# Altium PCB PCB.PcbDoc (part 2 of 2)
Units mm, origin at the board's own origin, x right, y up, seen from the top; angles counter-clockwise.
Board outline 50 x 50 mm, 4 copper layers (Top Layer, VCC, GND, Bottom Layer), stack 1.586 mm thick; 85 components, 151 nets, 720 pads, 300 vias.
Unrouted connection lines stored in the file: 6.
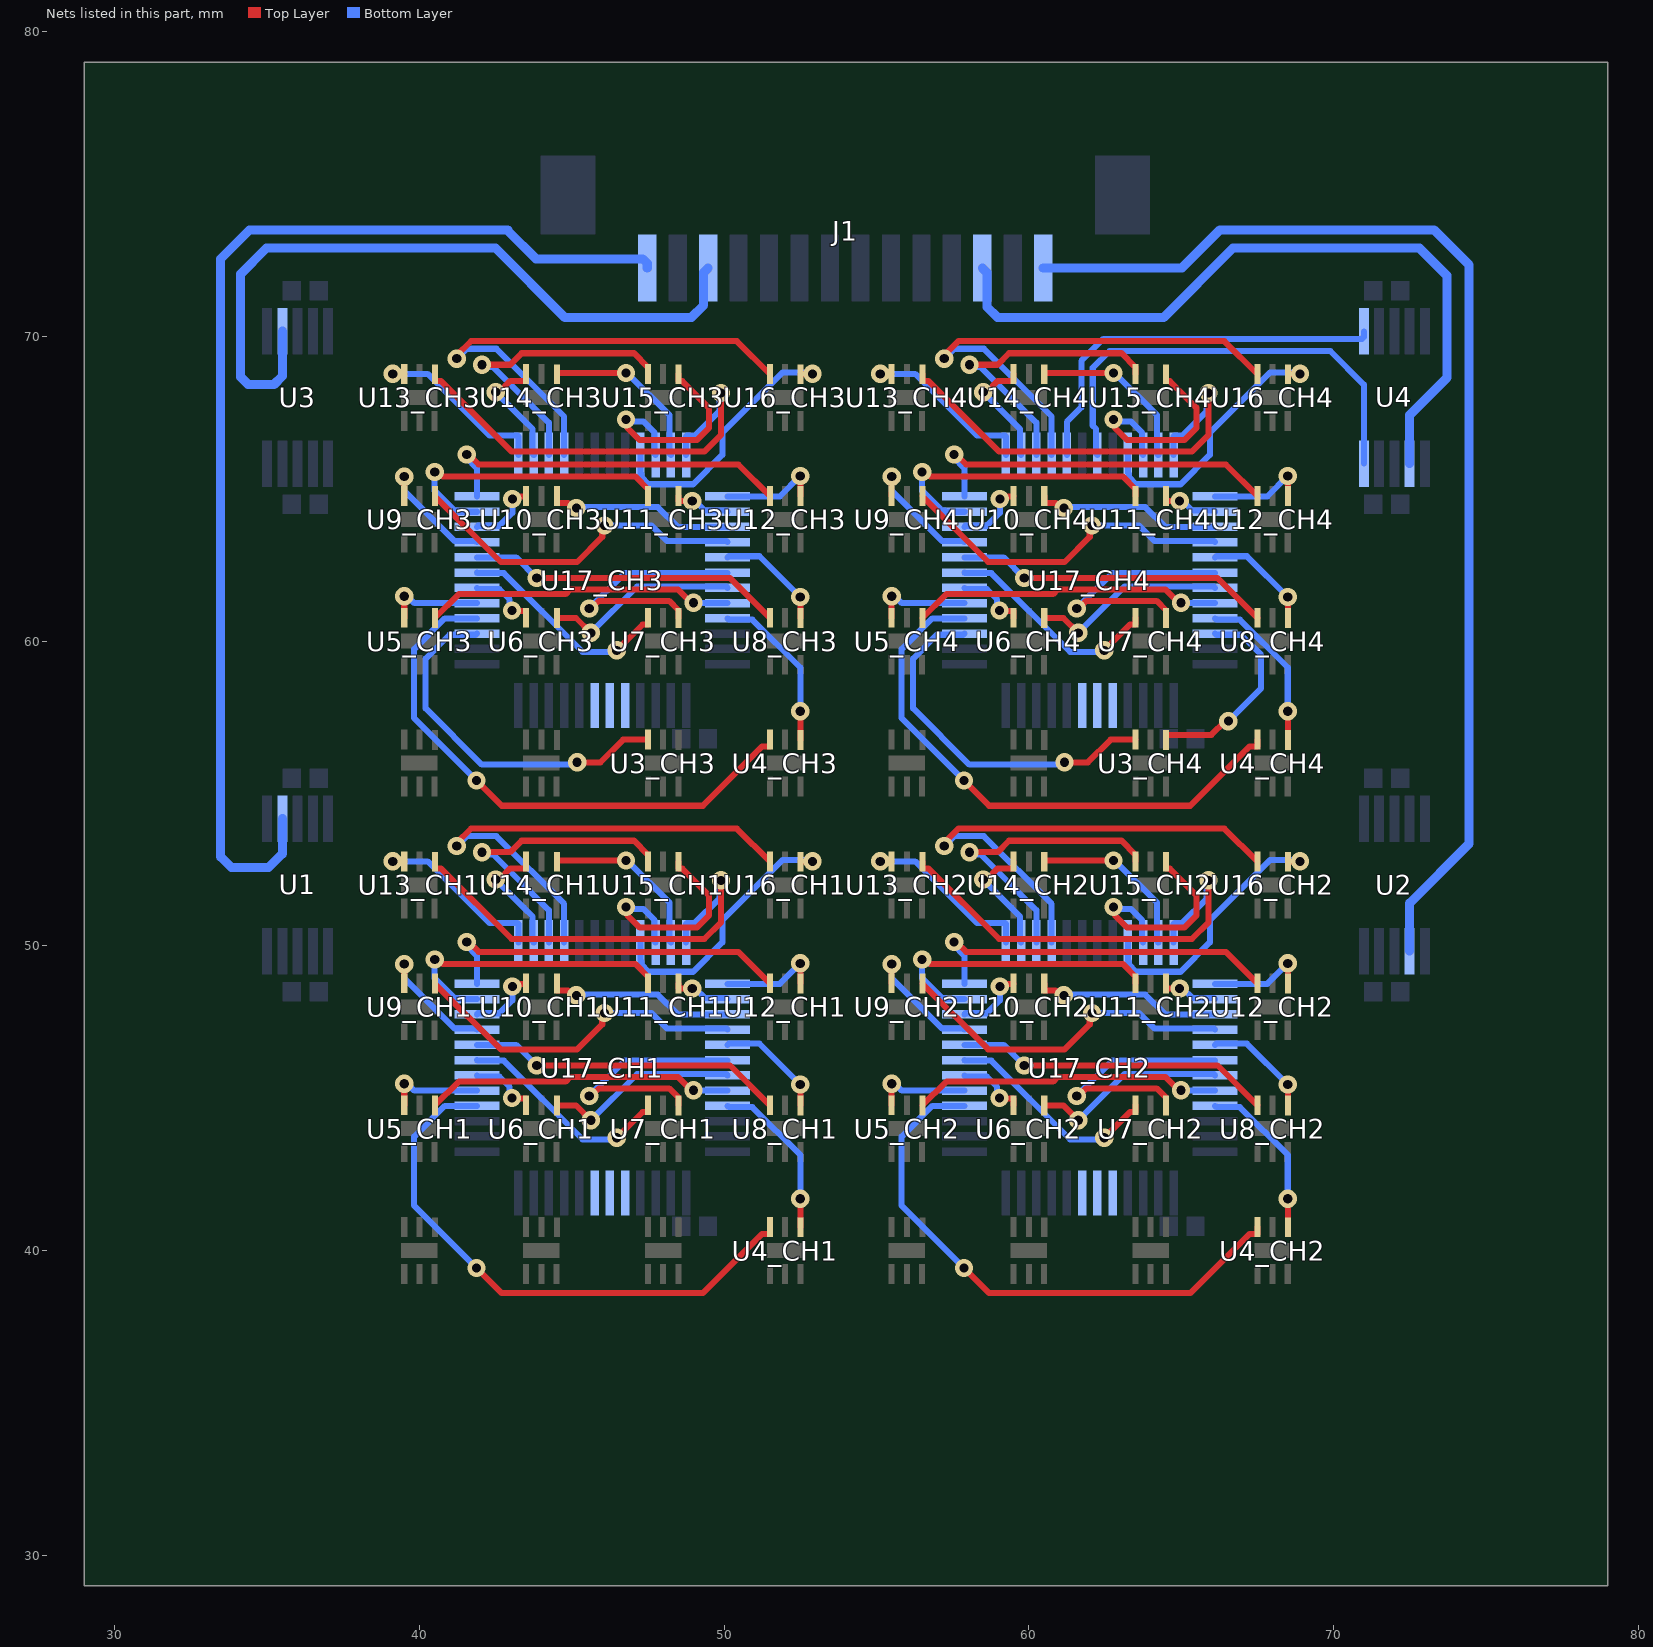
[diagram p4: the nets of this part, all layers, seen from the top]

## Via types
v1: diameter 0.6, hole 0.3, Top Layer to Bottom Layer, tented both sides, 292 vias
v2: diameter 0.9, hole 0.4, Top Layer to Bottom Layer, tented both sides, 8 vias

## Nets (pads, with @x,y where several pads share a name; then routed paths per layer and width w, separated by ;. In a path a pad name is that pad's centre, name@x,y a point inside that pad or via, vN(x,y) a via of type N, cw(c..) or ccw(c..) an arc to the next point about the centre after c; other vN are vias at no path point) (continued)
NetU3_CH3_6: U3_CH3.6 U17_CH3.27 | length 12.1
  Top Layer w0.2: v1(45.175,56.025) 45.942,56.025 46.687,56.77 U3_CH3.6@47.5,56.77
  Bottom Layer w0.2: U17_CH3.27@41.885,60.25 41.845,60.21 40.985,60.21 40.2,59.425 40.2,57.8 42.05,55.95 45.1,55.95 v1(45.175,56.025)
NetU3_CH4_4: U3_CH4.4 U17_CH4.10 | length 6.8
  Top Layer w0.2: U3_CH4.4@64.508,56.762 64.508,56.925 65.992,56.925 66.442,57.375 v1(66.55,57.375)
  Bottom Layer w0.2: U17_CH4.10@66.115,60.25 66.154,60.21 66.965,60.21 67.623,59.552 67.623,58.448 v1(66.55,57.375)
NetU3_CH4_6: U3_CH4.6 U17_CH4.27 | length 12.1
  Top Layer w0.2: v1(61.175,56.025) 61.942,56.025 62.687,56.77 U3_CH4.6@63.5,56.77
  Bottom Layer w0.2: U17_CH4.27@57.885,60.25 57.845,60.21 56.985,60.21 56.2,59.425 56.2,57.8 58.05,55.95 61.1,55.95 v1(61.175,56.025)
NetU4_1: U4.1 U17_CH4.41 | length 13.1
  Bottom Layer w0.2: U17_CH4.41@61.25,66.115 61.25,67.2 61.725,67.675 61.725,69.2 62.45,69.925 70.935,69.925 71,69.99 U4.1@71,70.172
NetU4_10: U4.10 U17_CH4.43 | length 15.1
  Bottom Layer w0.2: U17_CH4.43@62.25,66.115 62.21,66.154 62.21,66.965 62.1,67.075 62.1,68.975 62.65,69.525 69.895,69.525 71,68.42 U4.10@71,65.828
NetU4_CH1_4: U4_CH1.4 U17_CH1.9 | length 5.4
  Top Layer w0.2: v1(52.5,41.7) 52.508,41.692 U4_CH1.4@52.508,40.762
  Bottom Layer w0.2: U17_CH1.9@50.115,44.75 50.154,44.71 50.927,44.71 52.5,43.137 v1(52.5,41.7)
NetU4_CH1_6: U4_CH1.6 U17_CH1.28 | length 18.6
  Top Layer w0.2: v1(41.875,39.425) 42.7,38.6 49.3,38.6 51.245,40.545 51.5,40.545 U4_CH1.6@51.5,40.77
  Bottom Layer w0.2: v1(41.875,39.425) 39.825,41.475 39.825,43.74 40.835,44.75 U17_CH1.28@41.885,44.75
NetU4_CH2_4: U4_CH2.4 U17_CH2.9 | length 5.4
  Top Layer w0.2: v1(68.5,41.7) 68.508,41.692 U4_CH2.4@68.508,40.762
  Bottom Layer w0.2: U17_CH2.9@66.115,44.75 66.154,44.71 66.927,44.71 68.5,43.137 v1(68.5,41.7)
NetU4_CH2_6: U4_CH2.6 U17_CH2.28 | length 18.6
  Top Layer w0.2: v1(57.875,39.425) 58.7,38.6 65.3,38.6 67.245,40.545 67.5,40.545 U4_CH2.6@67.5,40.77
  Bottom Layer w0.2: v1(57.875,39.425) 55.825,41.475 55.825,43.74 56.835,44.75 U17_CH2.28@57.885,44.75
NetU4_CH3_4: U4_CH3.4 U17_CH3.9 | length 5.4
  Top Layer w0.2: v1(52.5,57.7) 52.508,57.692 U4_CH3.4@52.508,56.762
  Bottom Layer w0.2: U17_CH3.9@50.115,60.75 50.154,60.71 50.927,60.71 52.5,59.137 v1(52.5,57.7)
NetU4_CH3_6: U4_CH3.6 U17_CH3.28 | length 18.6
  Top Layer w0.2: v1(41.875,55.425) 42.7,54.6 49.3,54.6 51.245,56.545 51.5,56.545 U4_CH3.6@51.5,56.77
  Bottom Layer w0.2: v1(41.875,55.425) 39.825,57.475 39.825,59.74 40.835,60.75 U17_CH3.28@41.885,60.75
NetU4_CH4_4: U4_CH4.4 U17_CH4.9 | length 5.4
  Top Layer w0.2: v1(68.5,57.7) 68.508,57.692 U4_CH4.4@68.508,56.762
  Bottom Layer w0.2: U17_CH4.9@66.115,60.75 66.154,60.71 66.927,60.71 68.5,59.137 v1(68.5,57.7)
NetU4_CH4_6: U4_CH4.6 U17_CH4.28 | length 18.6
  Top Layer w0.2: v1(57.875,55.425) 58.7,54.6 65.3,54.6 67.245,56.545 67.5,56.545 U4_CH4.6@67.5,56.77
  Bottom Layer w0.2: v1(57.875,55.425) 55.825,57.475 55.825,59.74 56.835,60.75 U17_CH4.28@57.885,60.75
NetU5_CH1_4: U5_CH1.4 U17_CH1.8 | length 10.2
  Top Layer w0.2: U5_CH1.4@40.508,44.762 41.292,45.546 44.796,45.546 44.95,45.7 48.484,45.7 48.921,45.263 v1(48.997,45.263)
  Bottom Layer w0.2: v1(48.997,45.263) 49.004,45.256 50.108,45.256 U17_CH1.8@50.115,45.25
NetU5_CH1_6: U5_CH1.6 U17_CH1.29 | length 3.2
  Top Layer w0.2: U5_CH1.6@39.5,44.77 v1(39.5,45.475)
  Bottom Layer w0.2: v1(39.5,45.475) 39.608,45.475 39.833,45.25 U17_CH1.29@41.885,45.25
NetU5_CH2_4: U5_CH2.4 U17_CH2.8 | length 10.2
  Top Layer w0.2: U5_CH2.4@56.508,44.762 57.292,45.546 60.796,45.546 60.95,45.7 64.484,45.7 64.921,45.263 v1(64.997,45.263)
  Bottom Layer w0.2: v1(64.997,45.263) 65.004,45.256 66.108,45.256 U17_CH2.8@66.115,45.25
NetU5_CH2_6: U5_CH2.6 U17_CH2.29 | length 3.2
  Top Layer w0.2: U5_CH2.6@55.5,44.77 v1(55.5,45.475)
  Bottom Layer w0.2: v1(55.5,45.475) 55.608,45.475 55.833,45.25 U17_CH2.29@57.885,45.25
NetU5_CH3_4: U5_CH3.4 U17_CH3.8 | length 10.2
  Top Layer w0.2: U5_CH3.4@40.508,60.762 41.292,61.546 44.796,61.546 44.95,61.7 48.484,61.7 48.921,61.263 v1(48.997,61.263)
  Bottom Layer w0.2: v1(48.997,61.263) 49.004,61.256 50.108,61.256 U17_CH3.8@50.115,61.25
NetU5_CH3_6: U5_CH3.6 U17_CH3.29 | length 3.2
  Top Layer w0.2: U5_CH3.6@39.5,60.77 v1(39.5,61.475)
  Bottom Layer w0.2: v1(39.5,61.475) 39.608,61.475 39.833,61.25 U17_CH3.29@41.885,61.25
NetU5_CH4_4: U5_CH4.4 U17_CH4.8 | length 10.2
  Top Layer w0.2: U5_CH4.4@56.508,60.762 57.292,61.546 60.796,61.546 60.95,61.7 64.484,61.7 64.921,61.263 v1(64.997,61.263)
  Bottom Layer w0.2: v1(64.997,61.263) 65.004,61.256 66.108,61.256 U17_CH4.8@66.115,61.25
NetU5_CH4_6: U5_CH4.6 U17_CH4.29 | length 3.2
  Top Layer w0.2: U5_CH4.6@55.5,60.77 v1(55.5,61.475)
  Bottom Layer w0.2: v1(55.5,61.475) 55.608,61.475 55.833,61.25 U17_CH4.29@57.885,61.25
NetU6_CH1_4: U6_CH1.4 U17_CH1.7 | length 6.5
  Top Layer w0.2: U6_CH1.4@44.508,44.762 45.138,44.762 v1(45.625,44.275)
  Bottom Layer w0.2: v1(45.625,44.275) 47.14,45.79 50.075,45.79 U17_CH1.7@50.115,45.75
NetU6_CH1_6: U6_CH1.6 U17_CH1.30 | length 2.3
  Top Layer w0.2: v1(43.037,45.009) 43.051,44.995 43.5,44.995 U6_CH1.6@43.5,44.77
  Bottom Layer w0.2: U17_CH1.30@41.885,45.75 41.925,45.71 42.622,45.71 42.96,45.372 42.96,45.086 v1(43.037,45.009)
NetU6_CH2_4: U6_CH2.4 U17_CH2.7 | length 6.5
  Top Layer w0.2: U6_CH2.4@60.508,44.762 61.138,44.762 v1(61.625,44.275)
  Bottom Layer w0.2: v1(61.625,44.275) 63.14,45.79 66.075,45.79 U17_CH2.7@66.115,45.75
NetU6_CH2_6: U6_CH2.6 U17_CH2.30 | length 2.3
  Top Layer w0.2: v1(59.037,45.009) 59.051,44.995 59.5,44.995 U6_CH2.6@59.5,44.77
  Bottom Layer w0.2: U17_CH2.30@57.885,45.75 57.925,45.71 58.622,45.71 58.96,45.372 58.96,45.086 v1(59.037,45.009)
NetU6_CH3_4: U6_CH3.4 U17_CH3.7 | length 6.5
  Top Layer w0.2: U6_CH3.4@44.508,60.762 45.138,60.762 v1(45.625,60.275)
  Bottom Layer w0.2: v1(45.625,60.275) 47.14,61.79 50.075,61.79 U17_CH3.7@50.115,61.75
NetU6_CH3_6: U6_CH3.6 U17_CH3.30 | length 2.3
  Top Layer w0.2: v1(43.037,61.009) 43.051,60.995 43.5,60.995 U6_CH3.6@43.5,60.77
  Bottom Layer w0.2: U17_CH3.30@41.885,61.75 41.925,61.71 42.622,61.71 42.96,61.372 42.96,61.086 v1(43.037,61.009)
NetU6_CH4_4: U6_CH4.4 U17_CH4.7 | length 6.5
  Top Layer w0.2: U6_CH4.4@60.508,60.762 61.138,60.762 v1(61.625,60.275)
  Bottom Layer w0.2: v1(61.625,60.275) 63.14,61.79 66.075,61.79 U17_CH4.7@66.115,61.75
NetU6_CH4_6: U6_CH4.6 U17_CH4.30 | length 2.3
  Top Layer w0.2: v1(59.037,61.009) 59.051,60.995 59.5,60.995 U6_CH4.6@59.5,60.77
  Bottom Layer w0.2: U17_CH4.30@57.885,61.75 57.925,61.71 58.622,61.71 58.96,61.372 58.96,61.086 v1(59.037,61.009)
NetU7_CH1_4: U7_CH1.4 U17_CH1.6 | length 8.4
  Top Layer w0.2: v1(45.575,45.075) 45.645,45.075 45.892,45.322 48.194,45.322 48.508,45.008 U7_CH1.4@48.508,44.762
  Bottom Layer w0.2: v1(45.575,45.075) 46.736,46.236 U17_CH1.6@50.115,46.236
NetU7_CH1_6: U7_CH1.6 U17_CH1.31 | length 7.3
  Top Layer w0.2: v1(46.475,43.7) 47.32,44.545 47.5,44.545 U7_CH1.6@47.5,44.77
  Bottom Layer w0.2: U17_CH1.31@41.885,46.25 41.903,46.232 42.768,46.232 45.352,43.648 46.423,43.648 v1(46.475,43.7)
NetU7_CH2_4: U7_CH2.4 U17_CH2.6 | length 8.4
  Top Layer w0.2: v1(61.575,45.075) 61.645,45.075 61.892,45.322 64.194,45.322 64.508,45.008 U7_CH2.4@64.508,44.762
  Bottom Layer w0.2: v1(61.575,45.075) 62.736,46.236 U17_CH2.6@66.115,46.236
NetU7_CH2_6: U7_CH2.6 U17_CH2.31 | length 7.3
  Top Layer w0.2: v1(62.475,43.7) 63.32,44.545 63.5,44.545 U7_CH2.6@63.5,44.77
  Bottom Layer w0.2: U17_CH2.31@57.885,46.25 57.903,46.232 58.768,46.232 61.352,43.648 62.423,43.648 v1(62.475,43.7)
NetU7_CH3_4: U7_CH3.4 U17_CH3.6 | length 8.4
  Top Layer w0.2: v1(45.575,61.075) 45.645,61.075 45.892,61.322 48.194,61.322 48.508,61.008 U7_CH3.4@48.508,60.762
  Bottom Layer w0.2: v1(45.575,61.075) 46.736,62.236 U17_CH3.6@50.115,62.236
NetU7_CH3_6: U7_CH3.6 U17_CH3.31 | length 7.3
  Top Layer w0.2: v1(46.475,59.7) 47.32,60.545 47.5,60.545 U7_CH3.6@47.5,60.77
  Bottom Layer w0.2: U17_CH3.31@41.885,62.25 41.903,62.232 42.768,62.232 45.352,59.648 46.423,59.648 v1(46.475,59.7)
NetU7_CH4_4: U7_CH4.4 U17_CH4.6 | length 8.4
  Top Layer w0.2: v1(61.575,61.075) 61.645,61.075 61.892,61.322 64.194,61.322 64.508,61.008 U7_CH4.4@64.508,60.762
  Bottom Layer w0.2: v1(61.575,61.075) 62.736,62.236 U17_CH4.6@66.115,62.236
NetU7_CH4_6: U7_CH4.6 U17_CH4.31 | length 7.3
  Top Layer w0.2: v1(62.475,59.7) 63.32,60.545 63.5,60.545 U7_CH4.6@63.5,60.77
  Bottom Layer w0.2: U17_CH4.31@57.885,62.25 57.903,62.232 58.768,62.232 61.352,59.648 62.423,59.648 v1(62.475,59.7)
NetU8_CH1_4: U8_CH1.4 U17_CH1.5 | length 3.6
  Top Layer w0.2: v1(52.5,45.45) 52.508,45.442 U8_CH1.4@52.508,44.762
  Bottom Layer w0.2: U17_CH1.5@50.115,46.75 50.154,46.79 51.16,46.79 v1(52.5,45.45)
NetU8_CH1_6: U8_CH1.6 U17_CH1.32 | length 10.4
  Top Layer w0.2: v1(43.85,46.073) 50.197,46.073 U8_CH1.6@51.5,44.77
  Bottom Layer w0.2: U17_CH1.32@41.885,46.75 43.173,46.75 v1(43.85,46.073)
NetU8_CH2_4: U8_CH2.4 U17_CH2.5 | length 3.6
  Top Layer w0.2: v1(68.5,45.45) 68.508,45.442 U8_CH2.4@68.508,44.762
  Bottom Layer w0.2: U17_CH2.5@66.115,46.75 66.154,46.79 67.16,46.79 v1(68.5,45.45)
NetU8_CH2_6: U8_CH2.6 U17_CH2.32 | length 10.4
  Top Layer w0.2: v1(59.85,46.073) 66.197,46.073 U8_CH2.6@67.5,44.77
  Bottom Layer w0.2: U17_CH2.32@57.885,46.75 59.173,46.75 v1(59.85,46.073)
NetU8_CH3_4: U8_CH3.4 U17_CH3.5 | length 3.6
  Top Layer w0.2: v1(52.5,61.45) 52.508,61.442 U8_CH3.4@52.508,60.762
  Bottom Layer w0.2: U17_CH3.5@50.115,62.75 50.154,62.79 51.16,62.79 v1(52.5,61.45)
NetU8_CH3_6: U8_CH3.6 U17_CH3.32 | length 10.4
  Top Layer w0.2: v1(43.85,62.073) 50.197,62.073 U8_CH3.6@51.5,60.77
  Bottom Layer w0.2: U17_CH3.32@41.885,62.75 43.173,62.75 v1(43.85,62.073)
NetU8_CH4_4: U8_CH4.4 U17_CH4.5 | length 3.6
  Top Layer w0.2: v1(68.5,61.45) 68.508,61.442 U8_CH4.4@68.508,60.762
  Bottom Layer w0.2: U17_CH4.5@66.115,62.75 66.154,62.79 67.16,62.79 v1(68.5,61.45)
NetU8_CH4_6: U8_CH4.6 U17_CH4.32 | length 10.4
  Top Layer w0.2: v1(59.85,62.073) 66.197,62.073 U8_CH4.6@67.5,60.77
  Bottom Layer w0.2: U17_CH4.32@57.885,62.75 59.173,62.75 v1(59.85,62.073)
NetU9_CH1_4: U9_CH1.4 U17_CH1.4 | length 11.4
  Top Layer w0.2: U9_CH1.4@40.508,48.762 42.67,46.6 45.175,46.6 46.001,47.426 46.001,47.726 v1(46.075,47.8)
  Bottom Layer w0.2: v1(46.075,47.8) 47.613,47.8 48.124,47.29 50.075,47.29 U17_CH1.4@50.115,47.25
NetU9_CH1_6: U9_CH1.6 U17_CH1.33 | length 4.2
  Top Layer w0.2: U9_CH1.6@39.5,48.77 v1(39.5,49.4)
  Bottom Layer w0.2: v1(39.5,49.4) 39.5,48.938 41.055,47.383 41.148,47.29 41.845,47.29 U17_CH1.33@41.885,47.25
NetU9_CH2_4: U9_CH2.4 U17_CH2.4 | length 11.4
  Top Layer w0.2: U9_CH2.4@56.508,48.762 58.67,46.6 61.175,46.6 62.001,47.426 62.001,47.726 v1(62.075,47.8)
  Bottom Layer w0.2: v1(62.075,47.8) 63.613,47.8 64.124,47.29 66.075,47.29 U17_CH2.4@66.115,47.25
NetU9_CH2_6: U9_CH2.6 U17_CH2.33 | length 4.2
  Top Layer w0.2: U9_CH2.6@55.5,48.77 v1(55.5,49.4)
  Bottom Layer w0.2: v1(55.5,49.4) 55.5,48.938 57.055,47.383 57.148,47.29 57.845,47.29 U17_CH2.33@57.885,47.25
NetU9_CH3_4: U9_CH3.4 U17_CH3.4 | length 11.4
  Top Layer w0.2: U9_CH3.4@40.508,64.762 42.67,62.6 45.175,62.6 46.001,63.426 46.001,63.726 v1(46.075,63.8)
  Bottom Layer w0.2: v1(46.075,63.8) 47.613,63.8 48.124,63.29 50.075,63.29 U17_CH3.4@50.115,63.25
NetU9_CH3_6: U9_CH3.6 U17_CH3.33 | length 4.2
  Top Layer w0.2: U9_CH3.6@39.5,64.77 v1(39.5,65.4)
  Bottom Layer w0.2: v1(39.5,65.4) 39.5,64.938 41.055,63.383 41.148,63.29 41.845,63.29 U17_CH3.33@41.885,63.25
NetU9_CH4_4: U9_CH4.4 U17_CH4.4 | length 11.4
  Top Layer w0.2: U9_CH4.4@56.508,64.762 58.67,62.6 61.175,62.6 62.001,63.426 62.001,63.726 v1(62.075,63.8)
  Bottom Layer w0.2: v1(62.075,63.8) 63.613,63.8 64.124,63.29 66.075,63.29 U17_CH4.4@66.115,63.25
NetU9_CH4_6: U9_CH4.6 U17_CH4.33 | length 4.2
  Top Layer w0.2: U9_CH4.6@55.5,64.77 v1(55.5,65.4)
  Bottom Layer w0.2: v1(55.5,65.4) 55.5,64.938 57.055,63.383 57.148,63.29 57.845,63.29 U17_CH4.33@57.885,63.25
NetU10_CH1_4: U10_CH1.4 U17_CH1.3 | length 6.2
  Top Layer w0.2: U10_CH1.4@44.508,48.762 44.508,48.537 44.88,48.537 45.042,48.375 v1(45.15,48.375)
  Bottom Layer w0.2: v1(45.15,48.375) 45.175,48.4 47.825,48.4 48.475,47.75 U17_CH1.3@50.115,47.75
NetU10_CH1_6: U10_CH1.6 U17_CH1.34 | length 2.4
  Top Layer w0.2: v1(43.049,48.669) 43.049,48.75 43.5,48.75 U10_CH1.6@43.5,48.77
  Bottom Layer w0.2: U17_CH1.34@41.885,47.75 41.925,47.79 42.622,47.79 43.049,48.216 v1(43.049,48.669)
NetU10_CH2_4: U10_CH2.4 U17_CH2.3 | length 6.2
  Top Layer w0.2: U10_CH2.4@60.508,48.762 60.508,48.537 60.88,48.537 61.042,48.375 v1(61.15,48.375)
  Bottom Layer w0.2: v1(61.15,48.375) 61.175,48.4 63.825,48.4 64.475,47.75 U17_CH2.3@66.115,47.75
NetU10_CH2_6: U10_CH2.6 U17_CH2.34 | length 2.4
  Top Layer w0.2: v1(59.049,48.669) 59.049,48.75 59.5,48.75 U10_CH2.6@59.5,48.77
  Bottom Layer w0.2: U17_CH2.34@57.885,47.75 57.925,47.79 58.622,47.79 59.049,48.216 v1(59.049,48.669)
NetU10_CH3_4: U10_CH3.4 U17_CH3.3 | length 6.2
  Top Layer w0.2: U10_CH3.4@44.508,64.762 44.508,64.537 44.88,64.537 45.042,64.375 v1(45.15,64.375)
  Bottom Layer w0.2: v1(45.15,64.375) 45.175,64.4 47.825,64.4 48.475,63.75 U17_CH3.3@50.115,63.75
NetU10_CH3_6: U10_CH3.6 U17_CH3.34 | length 2.4
  Top Layer w0.2: v1(43.049,64.669) 43.049,64.75 43.5,64.75 U10_CH3.6@43.5,64.77
  Bottom Layer w0.2: U17_CH3.34@41.885,63.75 41.925,63.79 42.622,63.79 43.049,64.216 v1(43.049,64.669)
NetU10_CH4_4: U10_CH4.4 U17_CH4.3 | length 6.2
  Top Layer w0.2: U10_CH4.4@60.508,64.762 60.508,64.537 60.88,64.537 61.042,64.375 v1(61.15,64.375)
  Bottom Layer w0.2: v1(61.15,64.375) 61.175,64.4 63.825,64.4 64.475,63.75 U17_CH4.3@66.115,63.75
NetU10_CH4_6: U10_CH4.6 U17_CH4.34 | length 2.4
  Top Layer w0.2: v1(59.049,64.669) 59.049,64.75 59.5,64.75 U10_CH4.6@59.5,64.77
  Bottom Layer w0.2: U17_CH4.34@57.885,63.75 57.925,63.79 58.622,63.79 59.049,64.216 v1(59.049,64.669)
NetU11_CH1_4: U11_CH1.4 U17_CH1.2 | length 1.9
  Top Layer w0.2: U11_CH1.4@48.508,48.762 48.508,48.599 v1(48.951,48.599)
  Bottom Layer w0.2: v1(48.951,48.599) 49.06,48.599 49.369,48.29 50.075,48.29 U17_CH1.2@50.115,48.25
NetU11_CH1_6: U11_CH1.6 U17_CH1.35 | length 9.7
  Top Layer w0.2: v1(40.5,49.55) 40.608,49.55 40.758,49.4 47.095,49.4 47.5,48.995 U11_CH1.6@47.5,48.77
  Bottom Layer w0.2: v1(40.5,49.55) 40.5,48.938 41.055,48.383 41.148,48.29 41.249,48.29 41.288,48.25 U17_CH1.35@41.885,48.25
NetU11_CH2_4: U11_CH2.4 U17_CH2.2 | length 1.9
  Top Layer w0.2: U11_CH2.4@64.508,48.762 64.508,48.599 v1(64.951,48.599)
  Bottom Layer w0.2: v1(64.951,48.599) 65.06,48.599 65.369,48.29 66.075,48.29 U17_CH2.2@66.115,48.25
NetU11_CH2_6: U11_CH2.6 U17_CH2.35 | length 9.7
  Top Layer w0.2: v1(56.5,49.55) 56.608,49.55 56.758,49.4 63.095,49.4 63.5,48.995 U11_CH2.6@63.5,48.77
  Bottom Layer w0.2: v1(56.5,49.55) 56.5,48.938 57.055,48.383 57.148,48.29 57.249,48.29 57.288,48.25 U17_CH2.35@57.885,48.25
NetU11_CH3_4: U11_CH3.4 U17_CH3.2 | length 1.9
  Top Layer w0.2: U11_CH3.4@48.508,64.762 48.508,64.599 v1(48.951,64.599)
  Bottom Layer w0.2: v1(48.951,64.599) 49.06,64.599 49.369,64.29 50.075,64.29 U17_CH3.2@50.115,64.25
NetU11_CH3_6: U11_CH3.6 U17_CH3.35 | length 9.7
  Top Layer w0.2: v1(40.5,65.55) 40.608,65.55 40.758,65.4 47.095,65.4 47.5,64.995 U11_CH3.6@47.5,64.77
  Bottom Layer w0.2: v1(40.5,65.55) 40.5,64.938 41.055,64.383 41.148,64.29 41.249,64.29 41.288,64.25 U17_CH3.35@41.885,64.25
NetU11_CH4_4: U11_CH4.4 U17_CH4.2 | length 1.9
  Top Layer w0.2: U11_CH4.4@64.508,64.762 64.508,64.599 v1(64.951,64.599)
  Bottom Layer w0.2: v1(64.951,64.599) 65.06,64.599 65.369,64.29 66.075,64.29 U17_CH4.2@66.115,64.25
NetU11_CH4_6: U11_CH4.6 U17_CH4.35 | length 9.7
  Top Layer w0.2: v1(56.5,65.55) 56.608,65.55 56.758,65.4 63.095,65.4 63.5,64.995 U11_CH4.6@63.5,64.77
  Bottom Layer w0.2: v1(56.5,65.55) 56.5,64.938 57.055,64.383 57.148,64.29 57.249,64.29 57.288,64.25 U17_CH4.35@57.885,64.25
NetU12_CH1_4: U12_CH1.4 U17_CH1.1 | length 3.3
  Top Layer w0.2: v1(52.5,49.425) 52.508,49.417 U12_CH1.4@52.508,48.762
  Bottom Layer w0.2: U17_CH1.1@50.115,48.75 51.825,48.75 v1(52.5,49.425)
NetU12_CH1_6: U12_CH1.6 U17_CH1.36 | length 12
  Top Layer w0.2: v1(41.55,50.125) 41.619,50.125 41.944,49.8 50.47,49.8 U12_CH1.6@51.5,48.77
  Bottom Layer w0.2: v1(41.55,50.125) 41.55,50.017 41.885,49.682 U17_CH1.36@41.885,48.75
NetU12_CH2_4: U12_CH2.4 U17_CH2.1 | length 3.3
  Top Layer w0.2: v1(68.5,49.425) 68.508,49.417 U12_CH2.4@68.508,48.762
  Bottom Layer w0.2: U17_CH2.1@66.115,48.75 67.825,48.75 v1(68.5,49.425)
NetU12_CH2_6: U12_CH2.6 U17_CH2.36 | length 12
  Top Layer w0.2: v1(57.55,50.125) 57.619,50.125 57.944,49.8 66.47,49.8 U12_CH2.6@67.5,48.77
  Bottom Layer w0.2: v1(57.55,50.125) 57.55,50.017 57.885,49.682 U17_CH2.36@57.885,48.75
NetU12_CH3_4: U12_CH3.4 U17_CH3.1 | length 3.3
  Top Layer w0.2: v1(52.5,65.425) 52.508,65.417 U12_CH3.4@52.508,64.762
  Bottom Layer w0.2: U17_CH3.1@50.115,64.75 51.825,64.75 v1(52.5,65.425)
NetU12_CH3_6: U12_CH3.6 U17_CH3.36 | length 12
  Top Layer w0.2: v1(41.55,66.125) 41.619,66.125 41.944,65.8 50.47,65.8 U12_CH3.6@51.5,64.77
  Bottom Layer w0.2: v1(41.55,66.125) 41.55,66.017 41.885,65.682 U17_CH3.36@41.885,64.75
NetU12_CH4_4: U12_CH4.4 U17_CH4.1 | length 3.3
  Top Layer w0.2: v1(68.5,65.425) 68.508,65.417 U12_CH4.4@68.508,64.762
  Bottom Layer w0.2: U17_CH4.1@66.115,64.75 67.825,64.75 v1(68.5,65.425)
NetU12_CH4_6: U12_CH4.6 U17_CH4.36 | length 12
  Top Layer w0.2: v1(57.55,66.125) 57.619,66.125 57.944,65.8 66.47,65.8 U12_CH4.6@67.5,64.77
  Bottom Layer w0.2: v1(57.55,66.125) 57.55,66.017 57.885,65.682 U17_CH4.36@57.885,64.75
NetU13_CH1_4: U13_CH1.4 U17_CH1.48 | length 14.8
  Top Layer w0.2: U13_CH1.4@40.508,52.762 40.508,52.537 40.713,52.537 43.025,50.225 49.35,50.225 49.9,50.775 v1(49.9,52.15)
  Bottom Layer w0.2: U17_CH1.48@48.75,50.115 48.75,50.712 48.79,50.751 49.043,50.751 49.841,51.55 49.841,52.091 v1(49.9,52.15)
NetU13_CH1_6: U13_CH1.6 U17_CH1.37 | length 6
  Top Layer w0.2: v1(39.125,52.775) 39.5,52.775 U13_CH1.6@39.5,52.77
  Bottom Layer w0.2: v1(39.125,52.775) 40.27,52.775 42.294,50.751 43.21,50.751 43.25,50.712 U17_CH1.37@43.25,50.115
NetU13_CH2_4: U13_CH2.4 U17_CH2.48 | length 14.8
  Top Layer w0.2: U13_CH2.4@56.508,52.762 56.508,52.537 56.713,52.537 59.025,50.225 65.35,50.225 65.9,50.775 v1(65.9,52.15)
  Bottom Layer w0.2: U17_CH2.48@64.75,50.115 64.75,50.712 64.79,50.751 65.043,50.751 65.841,51.55 65.841,52.091 v1(65.9,52.15)
NetU13_CH2_6: U13_CH2.6 U17_CH2.37 | length 6
  Top Layer w0.2: v1(55.125,52.775) 55.5,52.775 U13_CH2.6@55.5,52.77
  Bottom Layer w0.2: v1(55.125,52.775) 56.27,52.775 58.294,50.751 59.21,50.751 59.25,50.712 U17_CH2.37@59.25,50.115
NetU13_CH3_4: U13_CH3.4 U17_CH3.48 | length 14.8
  Top Layer w0.2: U13_CH3.4@40.508,68.762 40.508,68.537 40.713,68.537 43.025,66.225 49.35,66.225 49.9,66.775 v1(49.9,68.15)
  Bottom Layer w0.2: U17_CH3.48@48.75,66.115 48.75,66.712 48.79,66.751 49.043,66.751 49.841,67.55 49.841,68.091 v1(49.9,68.15)
NetU13_CH3_6: U13_CH3.6 U17_CH3.37 | length 6
  Top Layer w0.2: v1(39.125,68.775) 39.5,68.775 U13_CH3.6@39.5,68.77
  Bottom Layer w0.2: v1(39.125,68.775) 40.27,68.775 42.294,66.751 43.21,66.751 43.25,66.712 U17_CH3.37@43.25,66.115
NetU13_CH4_4: U13_CH4.4 U17_CH4.48 | length 14.8
  Top Layer w0.2: U13_CH4.4@56.508,68.762 56.508,68.537 56.713,68.537 59.025,66.225 65.35,66.225 65.9,66.775 v1(65.9,68.15)
  Bottom Layer w0.2: U17_CH4.48@64.75,66.115 64.75,66.712 64.79,66.751 65.043,66.751 65.841,67.55 65.841,68.091 v1(65.9,68.15)
NetU13_CH4_6: U13_CH4.6 U17_CH4.37 | length 6
  Top Layer w0.2: v1(55.125,68.775) 55.5,68.775 U13_CH4.6@55.5,68.77
  Bottom Layer w0.2: v1(55.125,68.775) 56.27,68.775 58.294,66.751 59.21,66.751 59.25,66.712 U17_CH4.37@59.25,66.115
NetU14_CH1_4: U14_CH1.4 U17_CH1.47 | length 5.6
  Top Layer w0.2: U14_CH1.4@44.508,52.762 44.508,52.8 v1(46.777,52.8)
  Bottom Layer w0.2: v1(46.777,52.8) 46.825,52.8 48.21,51.415 48.21,50.154 U17_CH1.47@48.25,50.115
NetU14_CH1_6: U14_CH1.6 U17_CH1.38 | length 4
  Top Layer w0.2: v1(42.504,52.175) 42.612,52.175 42.982,52.545 43.5,52.545 U14_CH1.6@43.5,52.77
  Bottom Layer w0.2: v1(42.504,52.175) 43.425,51.254 43.71,50.968 43.71,50.154 U17_CH1.38@43.75,50.115
NetU14_CH2_4: U14_CH2.4 U17_CH2.47 | length 5.6
  Top Layer w0.2: U14_CH2.4@60.508,52.762 60.508,52.8 v1(62.777,52.8)
  Bottom Layer w0.2: v1(62.777,52.8) 62.825,52.8 64.21,51.415 64.21,50.154 U17_CH2.47@64.25,50.115
NetU14_CH2_6: U14_CH2.6 U17_CH2.38 | length 4
  Top Layer w0.2: v1(58.504,52.175) 58.612,52.175 58.982,52.545 59.5,52.545 U14_CH2.6@59.5,52.77
  Bottom Layer w0.2: v1(58.504,52.175) 59.425,51.254 59.71,50.968 59.71,50.154 U17_CH2.38@59.75,50.115
NetU14_CH3_4: U14_CH3.4 U17_CH3.47 | length 5.6
  Top Layer w0.2: U14_CH3.4@44.508,68.762 44.508,68.8 v1(46.777,68.8)
  Bottom Layer w0.2: v1(46.777,68.8) 46.825,68.8 48.21,67.415 48.21,66.154 U17_CH3.47@48.25,66.115
NetU14_CH3_6: U14_CH3.6 U17_CH3.38 | length 4
  Top Layer w0.2: v1(42.504,68.175) 42.612,68.175 42.982,68.545 43.5,68.545 U14_CH3.6@43.5,68.77
  Bottom Layer w0.2: v1(42.504,68.175) 43.425,67.254 43.71,66.968 43.71,66.154 U17_CH3.38@43.75,66.115
NetU14_CH4_4: U14_CH4.4 U17_CH4.47 | length 5.6
  Top Layer w0.2: U14_CH4.4@60.508,68.762 60.508,68.8 v1(62.777,68.8)
  Bottom Layer w0.2: v1(62.777,68.8) 62.825,68.8 64.21,67.415 64.21,66.154 U17_CH4.47@64.25,66.115
NetU14_CH4_6: U14_CH4.6 U17_CH4.38 | length 4
  Top Layer w0.2: v1(58.504,68.175) 58.612,68.175 58.982,68.545 59.5,68.545 U14_CH4.6@59.5,68.77
  Bottom Layer w0.2: v1(58.504,68.175) 59.425,67.254 59.71,66.968 59.71,66.154 U17_CH4.38@59.75,66.115
NetU15_CH1_4: U15_CH1.4 U17_CH1.46 | length 7.4
  Top Layer w0.2: v1(46.777,51.278) 46.827,51.229 46.827,50.998 47.225,50.6 49.108,50.6 49.5,50.992 49.5,51.666 48.629,52.537 48.508,52.537 U15_CH1.4@48.508,52.762
  Bottom Layer w0.2: v1(46.777,51.278) 46.843,51.212 47.35,51.212 47.71,50.852 47.71,50.154 U17_CH1.46@47.75,50.115
NetU15_CH1_6: U15_CH1.6 U17_CH1.39 | length 10.1
  Top Layer w0.2: v1(42.05,53.073) 42.052,53.075 42.975,53.075 43.35,53.45 47.045,53.45 47.5,52.995 U15_CH1.6@47.5,52.77
  Bottom Layer w0.2: v1(42.05,53.073) 42.125,52.998 42.425,52.998 44.25,51.174 U17_CH1.39@44.25,50.115
NetU15_CH2_4: U15_CH2.4 U17_CH2.46 | length 7.4
  Top Layer w0.2: v1(62.777,51.278) 62.827,51.229 62.827,50.998 63.225,50.6 65.108,50.6 65.5,50.992 65.5,51.666 64.629,52.537 64.508,52.537 U15_CH2.4@64.508,52.762
  Bottom Layer w0.2: v1(62.777,51.278) 62.843,51.212 63.35,51.212 63.71,50.852 63.71,50.154 U17_CH2.46@63.75,50.115
NetU15_CH2_6: U15_CH2.6 U17_CH2.39 | length 10.1
  Top Layer w0.2: v1(58.05,53.073) 58.052,53.075 58.975,53.075 59.35,53.45 63.045,53.45 63.5,52.995 U15_CH2.6@63.5,52.77
  Bottom Layer w0.2: v1(58.05,53.073) 58.125,52.998 58.425,52.998 60.25,51.174 U17_CH2.39@60.25,50.115
NetU15_CH3_4: U15_CH3.4 U17_CH3.46 | length 7.4
  Top Layer w0.2: v1(46.777,67.278) 46.827,67.229 46.827,66.998 47.225,66.6 49.108,66.6 49.5,66.992 49.5,67.666 48.629,68.537 48.508,68.537 U15_CH3.4@48.508,68.762
  Bottom Layer w0.2: v1(46.777,67.278) 46.843,67.212 47.35,67.212 47.71,66.852 47.71,66.154 U17_CH3.46@47.75,66.115
NetU15_CH3_6: U15_CH3.6 U17_CH3.39 | length 10.1
  Top Layer w0.2: v1(42.05,69.073) 42.052,69.075 42.975,69.075 43.35,69.45 47.045,69.45 47.5,68.995 U15_CH3.6@47.5,68.77
  Bottom Layer w0.2: v1(42.05,69.073) 42.125,68.998 42.425,68.998 44.25,67.174 U17_CH3.39@44.25,66.115
NetU15_CH4_4: U15_CH4.4 U17_CH4.46 | length 7.4
  Top Layer w0.2: v1(62.777,67.278) 62.827,67.229 62.827,66.998 63.225,66.6 65.108,66.6 65.5,66.992 65.5,67.666 64.629,68.537 64.508,68.537 U15_CH4.4@64.508,68.762
  Bottom Layer w0.2: v1(62.777,67.278) 62.843,67.212 63.35,67.212 63.71,66.852 63.71,66.154 U17_CH4.46@63.75,66.115
NetU15_CH4_6: U15_CH4.6 U17_CH4.39 | length 10.1
  Top Layer w0.2: v1(58.05,69.073) 58.052,69.075 58.975,69.075 59.35,69.45 63.045,69.45 63.5,68.995 U15_CH4.6@63.5,68.77
  Bottom Layer w0.2: v1(58.05,69.073) 58.125,68.998 58.425,68.998 60.25,67.174 U17_CH4.39@60.25,66.115
NetU16_CH1_4: U16_CH1.4 U17_CH1.45 | length 8.8
  Top Layer w0.2: U16_CH1.4@52.508,52.762 52.508,52.775 v1(52.9,52.775)
  Bottom Layer w0.2: U17_CH1.45@47.25,50.115 47.25,49.518 47.29,49.478 47.29,49.378 47.516,49.151 48.984,49.151 49.945,50.113 49.945,50.845 51.922,52.822 52.853,52.822 v1(52.9,52.775)
NetU16_CH1_6: U16_CH1.6 U17_CH1.40 | length 16.9
  Top Layer w0.2: v1(41.225,53.275) 41.225,53.383 41.692,53.85 50.42,53.85 U16_CH1.6@51.5,52.77
  Bottom Layer w0.2: v1(41.225,53.275) 41.55,53.6 42.525,53.6 44.75,51.375 U17_CH1.40@44.75,50.115
NetU16_CH2_4: U16_CH2.4 U17_CH2.45 | length 8.8
  Top Layer w0.2: U16_CH2.4@68.508,52.762 68.508,52.775 v1(68.9,52.775)
  Bottom Layer w0.2: U17_CH2.45@63.25,50.115 63.25,49.518 63.29,49.478 63.29,49.378 63.516,49.151 64.984,49.151 65.945,50.113 65.945,50.845 67.922,52.822 68.853,52.822 v1(68.9,52.775)
NetU16_CH2_6: U16_CH2.6 U17_CH2.40 | length 16.9
  Top Layer w0.2: v1(57.225,53.275) 57.225,53.383 57.692,53.85 66.42,53.85 U16_CH2.6@67.5,52.77
  Bottom Layer w0.2: v1(57.225,53.275) 57.55,53.6 58.525,53.6 60.75,51.375 U17_CH2.40@60.75,50.115
NetU16_CH3_4: U16_CH3.4 U17_CH3.45 | length 8.8
  Top Layer w0.2: U16_CH3.4@52.508,68.762 52.508,68.775 v1(52.9,68.775)
  Bottom Layer w0.2: U17_CH3.45@47.25,66.115 47.25,65.518 47.29,65.478 47.29,65.378 47.516,65.151 48.984,65.151 49.945,66.113 49.945,66.845 51.922,68.822 52.853,68.822 v1(52.9,68.775)
NetU16_CH3_6: U16_CH3.6 U17_CH3.40 | length 16.9
  Top Layer w0.2: v1(41.225,69.275) 41.225,69.383 41.692,69.85 50.42,69.85 U16_CH3.6@51.5,68.77
  Bottom Layer w0.2: v1(41.225,69.275) 41.55,69.6 42.525,69.6 44.75,67.375 U17_CH3.40@44.75,66.115
NetU16_CH4_4: U16_CH4.4 U17_CH4.45 | length 8.8
  Top Layer w0.2: U16_CH4.4@68.508,68.762 68.508,68.775 v1(68.9,68.775)
  Bottom Layer w0.2: U17_CH4.45@63.25,66.115 63.25,65.518 63.29,65.478 63.29,65.378 63.516,65.151 64.984,65.151 65.945,66.113 65.945,66.845 67.922,68.822 68.853,68.822 v1(68.9,68.775)
NetU16_CH4_6: U16_CH4.6 U17_CH4.40 | length 16.9
  Top Layer w0.2: v1(57.225,69.275) 57.225,69.383 57.692,69.85 66.42,69.85 U16_CH4.6@67.5,68.77
  Bottom Layer w0.2: v1(57.225,69.275) 57.55,69.6 58.525,69.6 60.75,67.375 U17_CH4.40@60.75,66.115
NetU17_CH1_17: U17_CH1.17
NetU17_CH1_18: U17_CH1.18 U17_CH2.18 U17_CH3.18 U17_CH4.18
NetU17_CH1_19: U17_CH1.19 U17_CH2.19 U17_CH3.19 U17_CH4.19
NetU17_CH2_17: U17_CH2.17
NetU17_CH3_17: U17_CH3.17
NetU17_CH4_17: U17_CH4.17
OUT1: J1.1 U1.7 | length 38.1
  Bottom Layer w0.3: U1.7@35.5,54.172 35.5,53.025 35.05,52.575 33.825,52.575 33.475,52.925 33.475,72.55 34.425,73.5 42.9,73.5 ; 42.9,73.475 43.825,72.55 47.325,72.55 47.475,72.4 J1.1@47.475,72.25
OUT2: J1.14 U2.7 | length 38.3
  Bottom Layer w0.3: J1.14@60.475,72.25 65.025,72.25 66.275,73.5 73.3,73.5 74.45,72.35 74.45,53.35 72.5,51.4 U2.7@72.5,49.828
OUT3: J1.3 U3.7 | length 24.4
  Bottom Layer w0.3: U3.7@35.5,70.172 35.5,68.7 35.225,68.425 34.375,68.425 34.125,68.675 34.125,72.05 34.975,72.9 42.5,72.9 44.775,70.625 48.925,70.625 49.325,71.025 49.325,72.1 J1.3@49.475,72.25
OUT4: J1.12 U4.7 | length 24.6
  Bottom Layer w0.3: J1.12@58.475,72.25 58.625,72.1 58.625,70.975 58.975,70.625 64.425,70.625 66.7,72.9 72.825,72.9 73.725,72 73.725,68.65 72.5,67.425 U4.7@72.5,65.828
pads on no net: J1.7 J1.8 J1.MP1 J1.MP2 U1.6 U1_CH1.2 U1_CH1.5 U1_CH1.7 U1_CH2.2 U1_CH2.5 U1_CH2.7 U1_CH3.2 U1_CH3.5 U1_CH3.7 U1_CH4.2 U1_CH4.5 U1_CH4.7 U2.6 U2_CH1.2 U2_CH1.5 U2_CH1.7 U2_CH2.2 U2_CH2.5 U2_CH2.7 U2_CH3.2 U2_CH3.5 U2_CH3.7 U2_CH4.2 U2_CH4.5 U2_CH4.7 U3.6 U3_CH1.2 U3_CH1.5 U3_CH1.7 U3_CH2.2 U3_CH2.5 U3_CH2.7 U3_CH3.2 U3_CH3.5 U3_CH3.7 U3_CH4.2 U3_CH4.5 U3_CH4.7 U4.6 U4_CH1.2 U4_CH1.5 U4_CH1.7 U4_CH2.2 U4_CH2.5 U4_CH2.7 U4_CH3.2 U4_CH3.5 U4_CH3.7 U4_CH4.2 U4_CH4.5 U4_CH4.7 U5_CH1.2 U5_CH1.5 U5_CH1.7 U5_CH2.2 U5_CH2.5 U5_CH2.7 U5_CH3.2 U5_CH3.5 U5_CH3.7 U5_CH4.2 U5_CH4.5 U5_CH4.7 U6_CH1.2 U6_CH1.5 U6_CH1.7 U6_CH2.2 U6_CH2.5 U6_CH2.7 U6_CH3.2 U6_CH3.5 U6_CH3.7 U6_CH4.2 U6_CH4.5 U6_CH4.7 U7_CH1.2 U7_CH1.5 U7_CH1.7 U7_CH2.2 U7_CH2.5 U7_CH2.7 U7_CH3.2 U7_CH3.5 U7_CH3.7 U7_CH4.2 U7_CH4.5 U7_CH4.7 U8_CH1.2 U8_CH1.5 U8_CH1.7 U8_CH2.2 U8_CH2.5 U8_CH2.7 U8_CH3.2 U8_CH3.5 U8_CH3.7 U8_CH4.2 U8_CH4.5 U8_CH4.7 U9_CH1.2 U9_CH1.5 U9_CH1.7 U9_CH2.2 U9_CH2.5 U9_CH2.7 U9_CH3.2 U9_CH3.5 U9_CH3.7 U9_CH4.2 U9_CH4.5 U9_CH4.7 U10_CH1.2 U10_CH1.5 U10_CH1.7 U10_CH2.2 U10_CH2.5 U10_CH2.7 U10_CH3.2 U10_CH3.5 U10_CH3.7 U10_CH4.2 U10_CH4.5 U10_CH4.7 U11_CH1.2 U11_CH1.5 U11_CH1.7 U11_CH2.2 U11_CH2.5 U11_CH2.7 U11_CH3.2 U11_CH3.5 U11_CH3.7 U11_CH4.2 U11_CH4.5 U11_CH4.7 U12_CH1.2 U12_CH1.5 U12_CH1.7 U12_CH2.2 U12_CH2.5 U12_CH2.7 U12_CH3.2 U12_CH3.5 U12_CH3.7 U12_CH4.2 U12_CH4.5 U12_CH4.7 U13_CH1.2 U13_CH1.5 U13_CH1.7 U13_CH2.2 U13_CH2.5 U13_CH2.7 U13_CH3.2 U13_CH3.5 U13_CH3.7 U13_CH4.2 U13_CH4.5 U13_CH4.7 U14_CH1.2 U14_CH1.5 U14_CH1.7 U14_CH2.2 U14_CH2.5 U14_CH2.7 U14_CH3.2 U14_CH3.5 U14_CH3.7 U14_CH4.2 U14_CH4.5 U14_CH4.7 U15_CH1.2 U15_CH1.5 U15_CH1.7 U15_CH2.2 U15_CH2.5 U15_CH2.7 U15_CH3.2 U15_CH3.5 U15_CH3.7 U15_CH4.2 U15_CH4.5 U15_CH4.7 U16_CH1.2 U16_CH1.5 U16_CH1.7 U16_CH2.2 U16_CH2.5 U16_CH2.7 U16_CH3.2 U16_CH3.5 U16_CH3.7 U16_CH4.2 U16_CH4.5 U16_CH4.7 U17_CH1.15 U17_CH1.16 U17_CH1.20 U17_CH1.21 U17_CH1.22 U17_CH1.42 U17_CH1.44 U17_CH2.15 U17_CH2.16 U17_CH2.20 U17_CH2.21 U17_CH2.22 U17_CH2.42 U17_CH2.44 U17_CH3.15 U17_CH3.16 U17_CH3.20 U17_CH3.21 U17_CH3.22 U17_CH3.42 U17_CH3.44 U17_CH4.15 U17_CH4.16 U17_CH4.20 U17_CH4.21 U17_CH4.22 U17_CH4.42 U17_CH4.44
copper on no net: | length 2.2
  Bottom Layer w0.2: 34.935,54.35 35,54.285 35,54.172 ; 34.935,70.237 35,70.172 ; 73,49.828 73,50.36 73.065,50.425 ; 73,66.425 73,65.828 73,66.475

## Polygon pours and split planes (outlines as drawn)
+5V on VCC "+5V_L02_P000" (solid, pour order 0): 32,32 76,32 76,76 32,76
GND on GND "GND_L03_P001" (solid, pour order 1): 32,32 76,32 76,76 32,76

## Other copper
Bottom Layer:
  rectangle net GND: 59.125,57.15 59.9,58.625
  rectangle net +5V: 64.1,56.475 64.9,58.625
  rectangle net GND: 43.125,57.15 43.9,58.625
  rectangle net +5V: 48.1,56.475 48.9,58.625
  rectangle net GND: 43.125,41.15 43.9,42.625
  rectangle net +5V: 48.1,40.475 48.9,42.625
  rectangle net +5V: 64.1,40.475 64.9,42.625
  rectangle net GND: 59.125,41.15 59.9,42.625

## Text inside footprints (layer, text, board x,y; h text height)
U1: Mechanical 13 "*" at 36.203,50.514 h1.27 r270; Bottom Overlay "*" at 37.203,49.257 h1.27 r270
U2: Mechanical 13 "*" at 71.797,53.486 h1.27 r90; Bottom Overlay "*" at 70.797,54.743 h1.27 r90
U3: Mechanical 13 "*" at 36.203,66.514 h1.27 r270; Bottom Overlay "*" at 37.203,65.257 h1.27 r270
U4: Mechanical 13 "*" at 71.797,69.486 h1.27 r90; Bottom Overlay "*" at 70.797,70.743 h1.27 r90
U17_CH1: Mechanical 13 "*" at 49.442,48.365 h1.27; Bottom Overlay "*" at 51.804,48.746 h1.27
U17_CH2: Mechanical 13 "*" at 65.442,48.365 h1.27; Bottom Overlay "*" at 67.804,48.746 h1.27
U17_CH3: Mechanical 13 "*" at 49.442,64.365 h1.27; Bottom Overlay "*" at 51.804,64.746 h1.27
U17_CH4: Mechanical 13 "*" at 65.442,64.365 h1.27; Bottom Overlay "*" at 67.804,64.746 h1.27